# EAGLE board POGO_DCDC (EAGLE 9.6.2)
REV: C
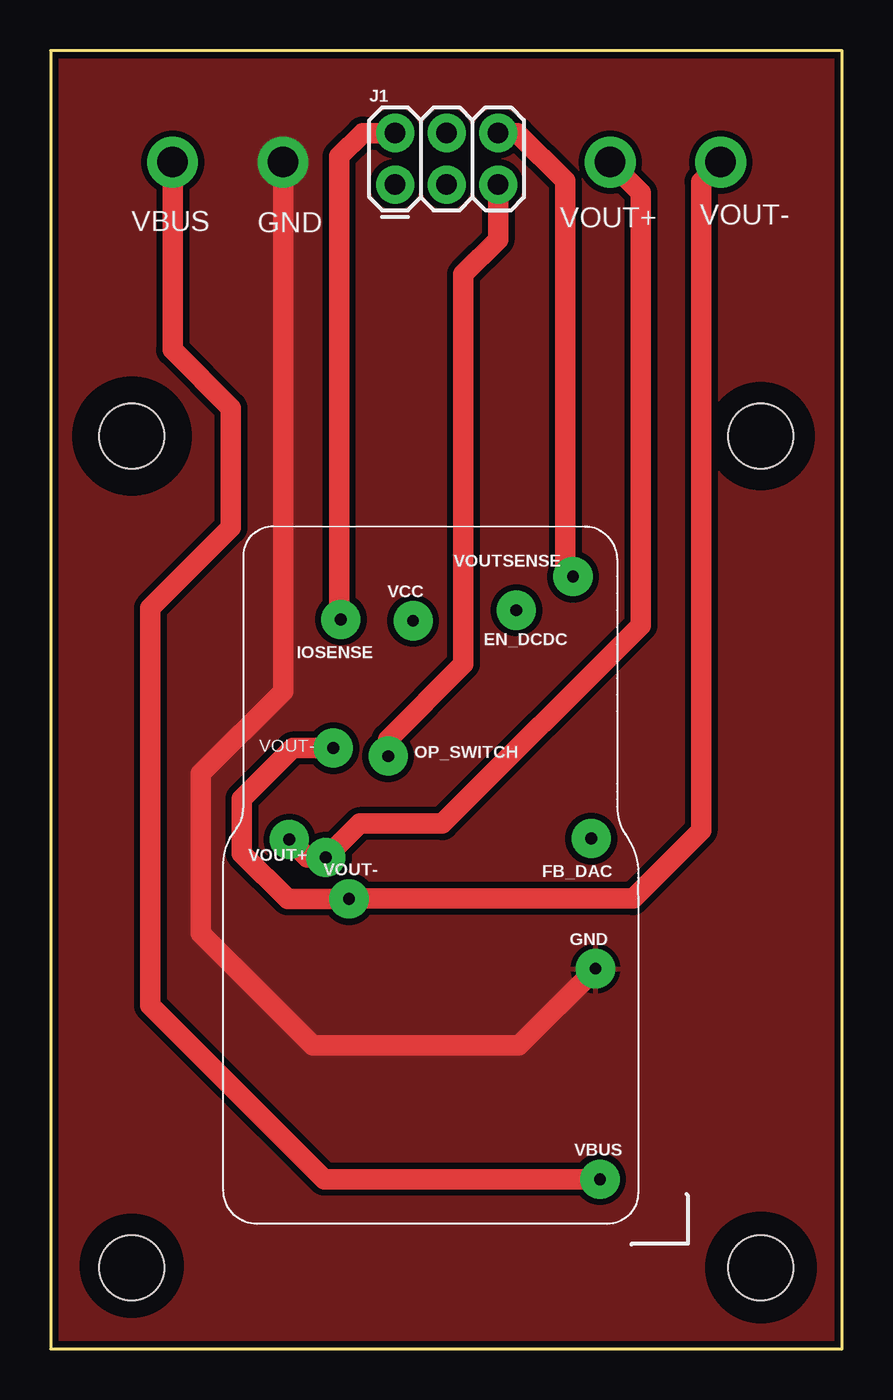
[diagram p0: board, top side]
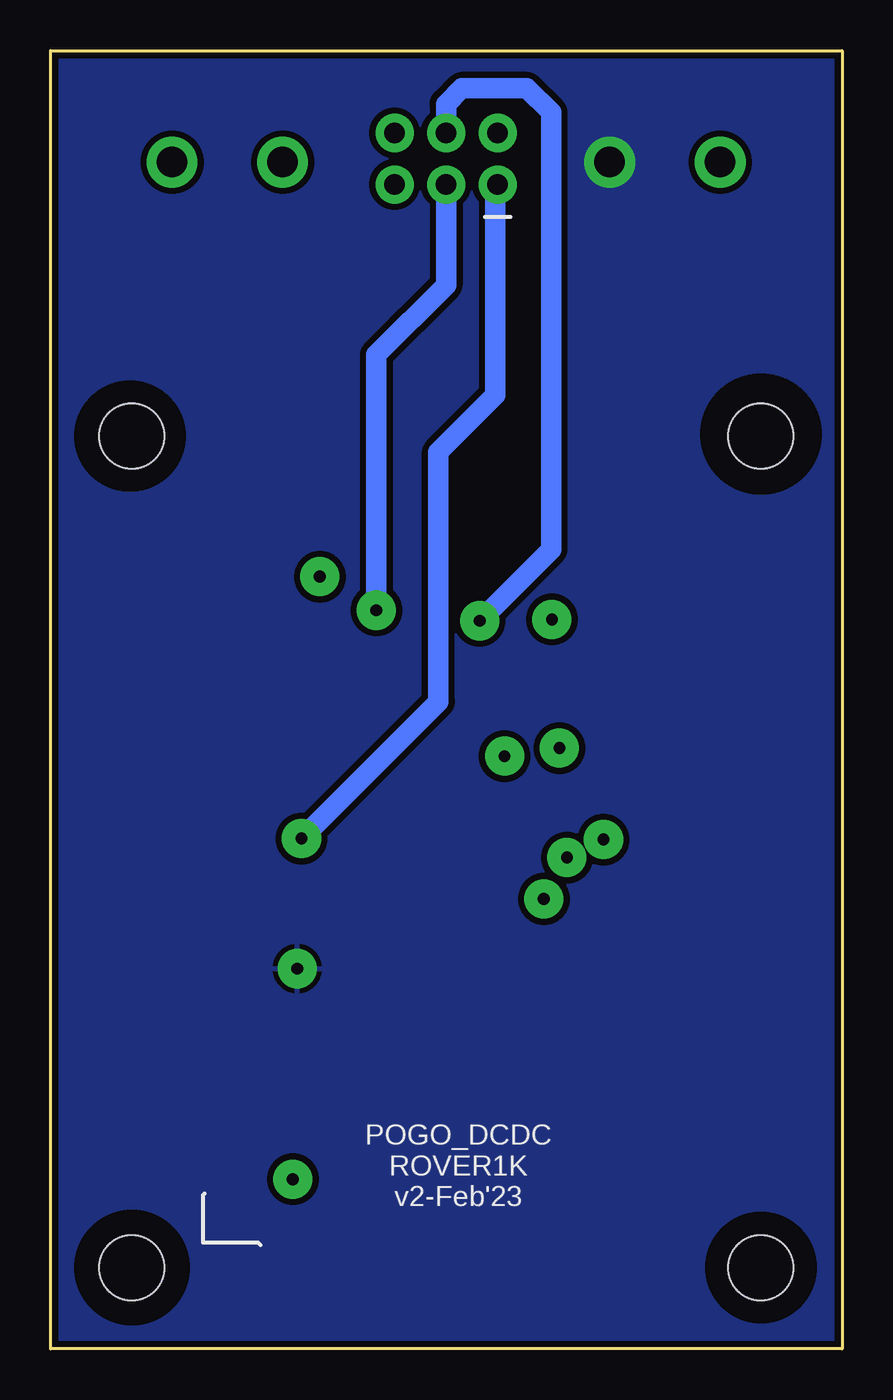
[diagram p1: board, bottom side, seen from below]

Size 39 x 64 mm. Coordinates in mm from the lower left corner, seen from the top.
Outline: 0,64 0,0 39,0 39,64 0,64
Copper layers (1*16): Top 0.035mm / dielectric 1.5mm / Bottom 0.035mm
Design rules "adafruit *": minimum track width 0.15mm, minimum drill 0.25mm, track to track 10mil, track to pad 10mil, pad to pad 10mil, via to via 10mil, smd to smd 5mil, copper to edge 8mil, drill to drill 8mil, minimum pad ring 10mil, minimum via ring 8mil, stop-mask expansion 2mil, vias tented up to drill 20mil, thermal gap 10mil
Net classes: 2 gnd: width 0.305 mm, drill 0.483 mm, clearance 0.203 mm
Holes 3.2 mm at 35,4 4,4 4,45 35,45
tRestrict: area 1.4,42.4 to 6.6,47.6; area 32.7,42.7 to 37.3,47.3; area 32.6,1.6 to 37.4,6.4; area 1.8,1.9 to 6.2,6.3
bRestrict: area 1.6,1.6 to 6.4,6.4; area 32.5,1.5 to 37.5,6.5; area 32.7,42.6 to 37.5,47.4; area 1.4,42.5 to 6.6,47.7

## Footprints (pad centres in the part's own frame; a part is rotated, then mirrored left to right if it is on the bottom)
1X01_POGOPIN_HOLE_0.061_DIA = drill 0.58 pad 1.93: 2 0,0
2X3 = drill 1.016 pad 1.88: 1 0,0; 2 0,2.54; 3 2.54,0; 4 2.54,2.54; 5 5.08,0; 6 5.08,2.54

## Placement (x,y rotation side)
EN_DCDC  [1X01_POGOPIN_HOLE_0.061_DIA]  22.95,36.41 0 top
FB_DAC  [1X01_POGOPIN_HOLE_0.061_DIA]  26.64,25.16 0 top
GND  [1X01_POGOPIN_HOLE_0.061_DIA]  26.85,18.74 0 top
IOSENSE  [1X01_POGOPIN_HOLE_0.061_DIA]  14.3,35.96 0 top
J1  FEMALE 2x3  [2X3]  16.97,57.4 0 top
OP_SWITCH  [1X01_POGOPIN_HOLE_0.061_DIA]  16.63,29.22 0 top
VBUS  [1X01_POGOPIN_HOLE_0.061_DIA]  27.07,8.36 0 top
VCC  [1X01_POGOPIN_HOLE_0.061_DIA]  17.86,35.89 0 top
VOUT+  [1X01_POGOPIN_HOLE_0.061_DIA]  13.56,24.22 0 top
VOUT+1  [1X01_POGOPIN_HOLE_0.061_DIA]  11.76,25.11 0 top
VOUT-  [1X01_POGOPIN_HOLE_0.061_DIA]  14.7,22.18 0 top
VOUT-1  [1X01_POGOPIN_HOLE_0.061_DIA]  13.93,29.62 0 top
VOUTSENSE  [1X01_POGOPIN_HOLE_0.061_DIA]  25.74,38.07 0 top

## Library data of the parts
EN_DCDC FB_DAC GND IOSENSE OP_SWITCH VBUS VCC VOUT+ VOUT+1 VOUT- VOUT-1 VOUTSENSE = SparkFun-Connectors
J1 = SparkFun-Connectors; PROD_ID: CONN-11566

## Nets
EN_DCDC: EN_DCDC.2 J1.3
FB_DAC: FB_DAC.2 J1.1
GND: GND.2
IOSENSE: IOSENSE.2 J1.2
OP_SWITCH: J1.5 OP_SWITCH.2
VBUS: VBUS.2
VCC: J1.4 VCC.2
VOUT+: VOUT+1.2 VOUT+.2
VOUT-: VOUT-1.2 VOUT-.2
VOUTSENSE: J1.6 VOUTSENSE.2

## Tracks (layer width: path | path; a pad name or v marks a point on that pad's centre or on a via)
EN_DCDC
  Bottom 1.016: J1.3 19.51,52.45 22.95,49.02 EN_DCDC.2
FB_DAC
  Bottom 1.016: FB_DAC.2 19.9,31.9 19.9,44.21 17.08,47.03 17.08,57.29 J1.1
GND  (via drill 1.5 pad 2.5)
  Top 1.016: v11.45,58.51 11.45,32.42 7.39,28.36 7.39,20.48 12.91,14.96 23.07,14.96 GND.2
  pour Bottom (isolate 0.305): -1.24,65.34 -1.24,-1.11 1.32,-3.67 38.86,-3.67 42.94,0.41 42.94,61.98 38.95,65.97 -0.6,65.97 -1.23,65.34
  pour Top (isolate 0.305): -3.4,68.6 -3.4,-2.6 0.8,-6.8 40.4,-6.8 45.7,-1.5 45.7,64.3 45.1,64.9 41.4,68.6
IOSENSE
  Top 1.016: IOSENSE.2 14.22,36.04 14.22,58.79 15.37,59.94 J1.2
OP_SWITCH
  Top 1.016: J1.5 22.05,54.68 20.34,52.97 20.34,33.76 16.63,30.05 OP_SWITCH.2
VBUS  (via drill 1.5 pad 2.5)
  Top 1.016: v6.01,58.51 6.01,49.26 8.88,46.38 8.88,40.48 4.91,36.51 4.91,16.92 13.47,8.36 VBUS.2
VCC
  Bottom 1.016: VCC.2 14.34,39.41 14.34,60.96 15.53,62.15 18.73,62.15 19.51,61.37 J1.4
VOUT+  (via drill 1.5 pad 2.5)
  Top 1.016: VOUT+1.2 12.65,24.22 VOUT+.2 15.23,25.89 19.3,25.89 29.08,35.67 29.08,57 v27.57,58.51
VOUT-  (via drill 1.5 pad 2.5)
  Top 1.016: v33.02,58.51 32.06,57.55 32.06,25.55 28.71,22.2 14.72,22.2 VOUT-.2 11.67,22.18 9.42,24.43 9.42,27.12 11.92,29.62 VOUT-1.2
VOUTSENSE
  Top 1.016: VOUTSENSE.2 25.35,38.46 25.35,57.59 23,59.94 J1.6

## Text on the board
tNames: VBUS | GND | VOUT+ | VOUT- | VOUT-
bNames: POGO_DCDC / ROVER1K / v2-Feb'23